# Altium PCB PCB1.PcbDoc
Units mm, origin at the board's own origin, x right, y up, seen from the top; angles counter-clockwise.
Board outline 20 x 15 mm, 2 copper layers (Top Layer, Bottom Layer); 3 components, 0 nets, 4 pads, 0 vias.
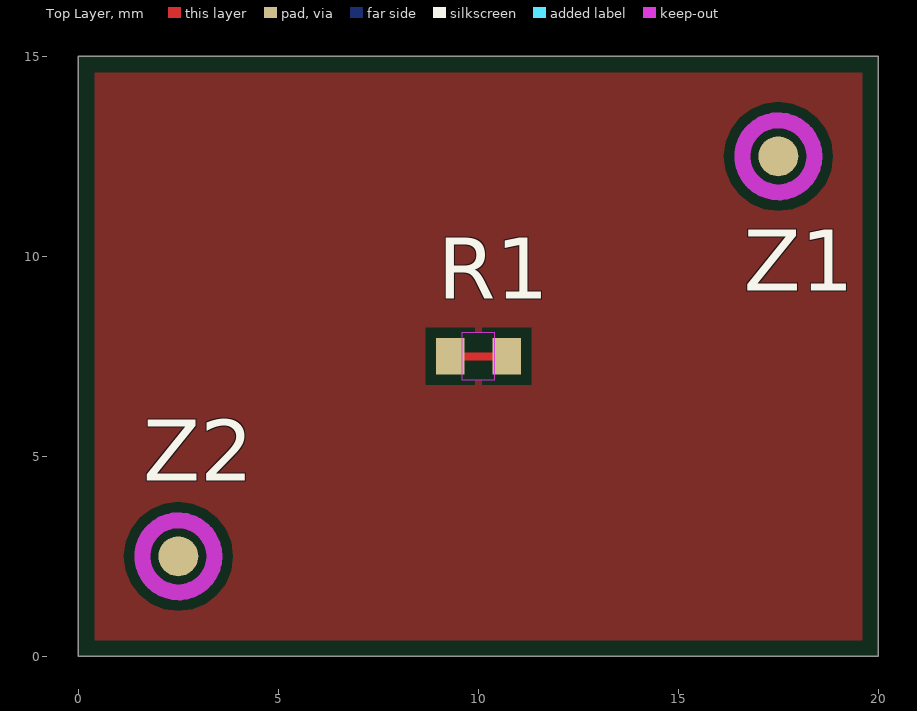
[diagram p0: Top Layer view]
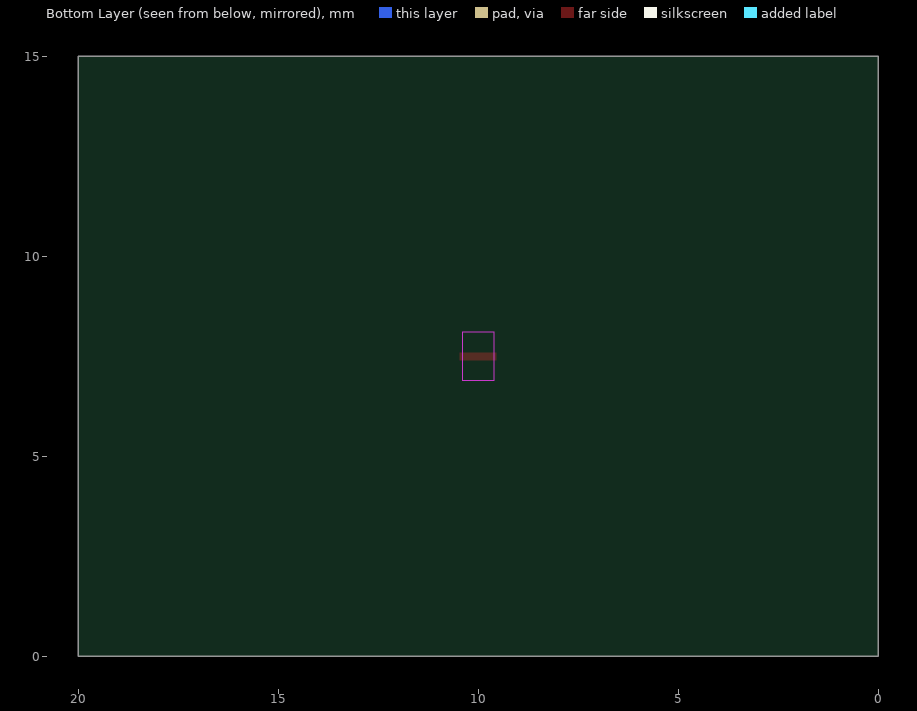
[diagram p1: Bottom Layer view, seen from below]

## Layer stack, top to bottom
Top Solder: solder mask 0.0102, Solder Resist, Dk 3.5
Top Layer: signal copper 0.0356
Dielectric 1: dielectric 0.32, FR-4, Dk 4.8
Bottom Layer: signal copper 0.0356
Bottom Solder: solder mask 0.0102, Solder Resist, Dk 3.5

## Board outline
0,0 0,15 20,15 20,0

## Design rules (kind name [scope] priority, off if disabled: settings)
BoardOutlineClearance [All] p1: gap=0.4 ignorepadtopadclearanceinfootprint=FALSE
Clearance [All] p1: gap=0.254 ignorepadtopadclearanceinfootprint=FALSE
PolygonConnect [All] p1: connectstyle=Relief reliefconductorwidth=0.254 reliefentries=4 polygonreliefangle="90 Angle" airgapwidth=0.254
RoutingVias [All] p1: holewidth=0.711 width=1.27 viastyle="Through Hole" minholewidth=0.711 minwidth=1.27 maxholewidth=0.711 maxwidth=1.27
SolderMaskExpansion [All] p1: expansion=0.102 istentingtop=FALSE
Width [All] p1: maxlimit=0.254 minlimit=0.254 preferedwidth=0.254
30 further rules are at their usual default settings.

## Components (designator, comment, footprint, x,y, rotation, side; value= is the part's Value field where it differs from the comment)
R1 "n.b." R0603NB-0R 10,7.5 r0 top net-tie
Z1 "FIDU_R" FIDU_R 17.5,12.5 r0 top
Z2 "FIDU_R" FIDU_R 2.5,2.5 r0 top

## Footprints (in the part's own frame and the unit in brackets; to place one, negate y for a bottom-side part, rotate by r counter-clockwise, add the part's x,y. Pads: shape width x height; smd on the part's side, far side on the other; paste and mask are expansions set on the pad)
FIDU_R [mm] "Fiducial Mark d=1mm"
  round 1 smd paste-0.55 mask+0.5: 0(0,0)
  Top Layer keep-out circle w0.4: c0,0 r0.9
R0603NB-0R [mil] "nicht bestückt - Brücke"
  rect 28x36 smd paste-0.98: 1(-27.56,0) 2(28,0)
  Top Layer region: -17.72,-3.94 18.7,-3.94 18.7,3.94 -17.72,3.94
  Keep-Out Layer pour cut-out: -15.75,23.62 15.75,23.62 15.75,-23.62 -15.75,-23.62

## Part data
R1: library part N.B.-0603_0R, "n.b. nicht bestückt - Brücke", BE-NR=keine
Z1 Z2: library part FIDUCIAL_KREIS, "Fiducial rund 1mm", BE-NR=keine

## Nets (pads, with @x,y where several pads share a name; then routed paths per layer and width w, separated by ;. In a path a pad name is that pad's centre, name@x,y a point inside that pad or via, vN(x,y) a via of type N, cw(c..) or ccw(c..) an arc to the next point about the centre after c; other vN are vias at no path point)
pads on no net: R1.1 R1.2 Z1.0 Z2.0

## Polygon pours and split planes (outlines as drawn)
no net on Top Layer "NONET_L-01_P-001" (solid, pour order 0): 0,0 0,15 20,15 20,0

## Silkscreen, mask and mechanical layers (free items; w line width, h text height)
Board Shape:
  the board outline again, w0.1